# EAGLE board AVRPADPTR (EAGLE 6.2)
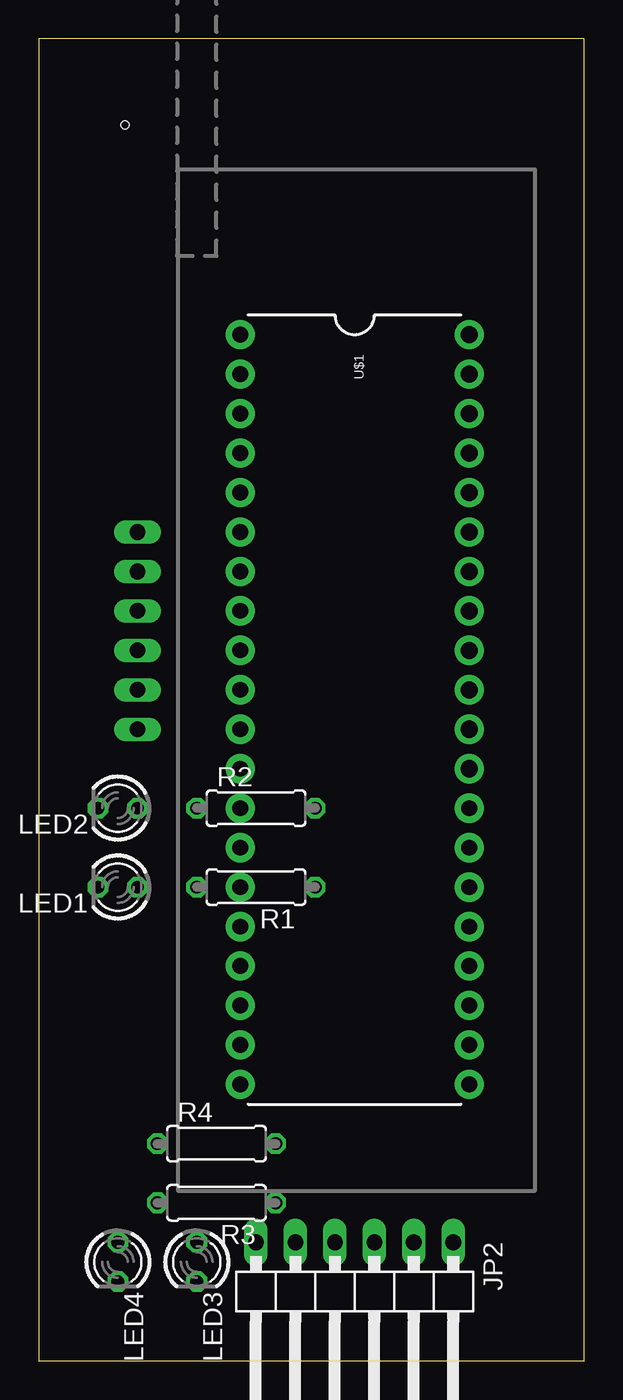
[diagram p0: board, top side]
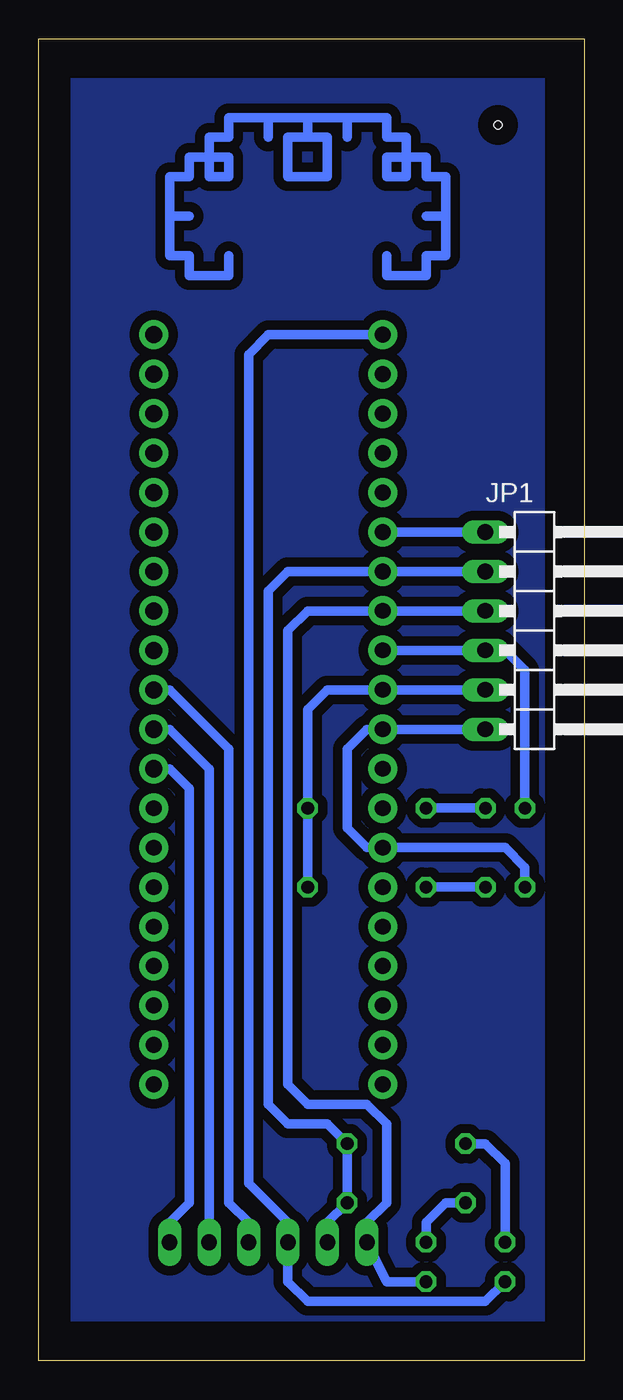
[diagram p1: board, bottom side, seen from below]

Size 35.08 x 85.08 mm. Coordinates in mm from the lower left corner, seen from the top.
Outline: 0,0 35.08,0 35.08,85.08 0,85.08 0,0
Copper layers (1*16): Top 0.035mm / dielectric 1.5mm / Bottom 0.035mm
Design rules: minimum track width 10mil, minimum drill 24mil, track to track 24mil, track to pad 24mil, pad to pad 8mil, via to via 8mil, smd to smd 8mil, copper to edge 40mil, drill to drill 8mil, minimum pad ring 10mil, minimum via ring 8mil, stop-mask expansion 4mil, vias tented up to drill 0mil, thermal gap 10mil
Holes 0.5 mm at 5.54,79.54

## Footprints (pad centres in the part's own frame; a part is rotated, then mirrored left to right if it is on the bottom)
1X06/90 = drill 1.016 long: 1 -6.35,-3.81; 2 -3.81,-3.81; 3 -1.27,-3.81; 4 1.27,-3.81; 5 3.81,-3.81; 6 6.35,-3.81
LED3MM = drill 0.813 octagon: A -1.27,0; K 1.27,0
0207/7 = drill 0.813 octagon: 1 -3.81,0; 2 3.81,0
DIL40-6-ZIF_SOCKET = drill 1.016 pad 1.88: 1 -24.13,-7.366; 2 -21.59,-7.366; 3 -19.05,-7.366; 4 -16.51,-7.366; 5 -13.97,-7.366; 6 -11.43,-7.366; 7 -8.89,-7.366; 8 -6.35,-7.366; 9 -3.81,-7.366; 10 -1.27,-7.366; 11 1.27,-7.366; 12 3.81,-7.366; 13 6.35,-7.366; 14 8.89,-7.366; 15 11.43,-7.366; 16 13.97,-7.366; 17 16.51,-7.366; 18 19.05,-7.366; 19 21.59,-7.366; 20 24.13,-7.366; 21 24.13,7.366; 22 21.59,7.366; 23 19.05,7.366; 24 16.51,7.366; 25 13.97,7.366; 26 11.43,7.366; 27 8.89,7.366; 28 6.35,7.366 | drill 1.1 pad 1.88: 29 3.81,7.366; 30 1.27,7.366; 31 -1.27,7.366; 32 -3.81,7.366; 33 -6.35,7.366; 34 -8.89,7.366; 35 -11.43,7.366; 36 -13.97,7.366; 37 -16.51,7.366; 38 -19.05,7.366; 39 -21.59,7.366; 40 -24.13,7.366

## Placement (x,y rotation side)
JP1  [1X06/90]  2.54,46.99 270 bottom
JP2  [1X06/90]  20.32,3.81 180 top
LED1  [LED3MM]  5.08,30.48 180 top
LED2  [LED3MM]  5.08,35.56 180 top
LED3  [LED3MM]  10.16,6.35 270 top
LED4  [LED3MM]  5.08,6.35 270 top
R1  [0207/7]  13.97,30.48 180 top
R2  [0207/7]  13.97,35.56 0 top
R3  [0207/7]  11.43,10.16 180 top
R4  [0207/7]  11.43,13.97 0 top
U$1  ZIFSOCKET-40-6DIL40-6-ZIF_SOCKET  [DIL40-6-ZIF_SOCKET]  20.32,41.91 270 top

## Library data of the parts
JP1 JP2 = pinhead
LED1-LED4 = led
R1-R4 = resistor
U$1 = SparkFun

## Nets
GND40: JP1.6 LED1.K U$1.11
MISO28: JP2.2 U$1.30
MISO40_VCC28: JP1.2 JP2.5 R3.1 R4.2 U$1.7
MOSI28: JP2.1 U$1.29
MOSI40: JP1.1 U$1.6
N$1: LED1.A R1.2
N$2: LED2.A R2.1
N$4: LED3.A R3.2
N$5: LED4.A R4.1
RST28: JP2.4 LED4.K U$1.1
RST40: JP1.4 LED2.K U$1.9
SCK28: JP2.3 U$1.31
SCK40_GND28: JP1.3 JP2.6 LED3.K U$1.8
VCC40: JP1.5 R1.1 R2.2 U$1.10

## Tracks (layer width: path | path; a pad name or v marks a point on that pad's centre or on a via)
GND40
  Bottom 0.61: JP1.6 U$1.11 13.97,40.64 15.24,39.37 15.24,34.29 13.97,33.02 5.08,33.02 3.81,31.75 LED1.K
MISO28
  Bottom 0.61: JP2.2 24.13,38.1 26.67,40.64 U$1.30
MISO40_VCC28
  Bottom 0.61: JP1.2 U$1.7 19.05,50.8 20.32,49.53 20.32,16.51 19.05,15.24 16.51,15.24 R4.2 R3.1 16.51,8.89 JP2.5
MOSI28
  Bottom 0.61: JP2.1 26.67,8.89 25.4,10.16 25.4,36.83 26.67,38.1 U$1.29
MOSI40
  Bottom 0.61: JP1.1 U$1.6
N$1
  Bottom 0.61: R1.2 LED1.A
N$2
  Bottom 0.61: R2.1 LED2.A
N$3
  pour Bottom: 2.54,2.54 2.54,82.55 33.02,82.55 33.02,2.54
N$4
  Bottom 0.61: R3.2 8.89,10.16 10.16,8.89 LED3.A
N$5
  Bottom 0.61: LED4.A 5.08,12.7 6.35,13.97 R4.1
N$6
  Bottom 0.61: 12.7,71.12 12.7,69.85 10.16,69.85 10.16,71.12 8.89,71.12 8.89,73.66 | 10.16,73.66 8.89,73.66 | 8.89,73.66 8.89,76.2 10.16,76.2 10.16,77.47 12.7,77.47 12.7,76.2 11.43,76.2 11.43,78.74 12.7,78.74 12.7,80.01 15.24,80.01 | 15.24,78.74 15.24,80.01 | 15.24,80.01 17.78,80.01 | 17.78,78.74 19.05,78.74 19.05,76.2 16.51,76.2 16.51,78.74 17.78,78.74 | 17.78,78.74 17.78,80.01 | 17.78,80.01 20.32,80.01 | 20.32,78.74 20.32,80.01 | 20.32,80.01 22.86,80.01 22.86,78.74 24.13,78.74 24.13,76.2 22.86,76.2 22.86,77.47 25.4,77.47 25.4,76.2 26.67,76.2 26.67,73.66 | 25.4,73.66 26.67,73.66 | 26.67,73.66 26.67,71.12 25.4,71.12 25.4,69.85 22.86,69.85 22.86,71.12
RST28
  Bottom 0.61: U$1.1 20.32,66.04 21.59,64.77 21.59,11.43 19.05,8.89 JP2.4 19.05,5.08 17.78,3.81 6.35,3.81 LED4.K
RST40
  Bottom 0.61: U$1.9 JP1.4 5.08,45.72 3.81,44.45 LED2.K
SCK28
  Bottom 0.61: U$1.31 26.67,43.18 22.86,39.37 22.86,10.16 21.59,8.89 JP2.3
SCK40_GND28
  Bottom 0.61: JP1.3 U$1.8 17.78,48.26 19.05,46.99 19.05,17.78 17.78,16.51 13.97,16.51 12.7,15.24 12.7,10.16 13.97,8.89 JP2.6 12.7,5.08 LED3.K
VCC40
  Bottom 0.61: JP1.5 U$1.10 16.51,43.18 17.78,41.91 R2.2 R1.1